# Altium PCB Cheater Dice (00).PcbDoc
Units mil, origin at the board's own origin, x right, y up, seen from the top; angles counter-clockwise.
Board outline 1978.53 x 1230.5 mil, 2 copper layers (Top Layer, Bottom Layer); 33 components, 24 nets, 99 pads, 6 vias.
Unrouted connection lines stored in the file: 26.
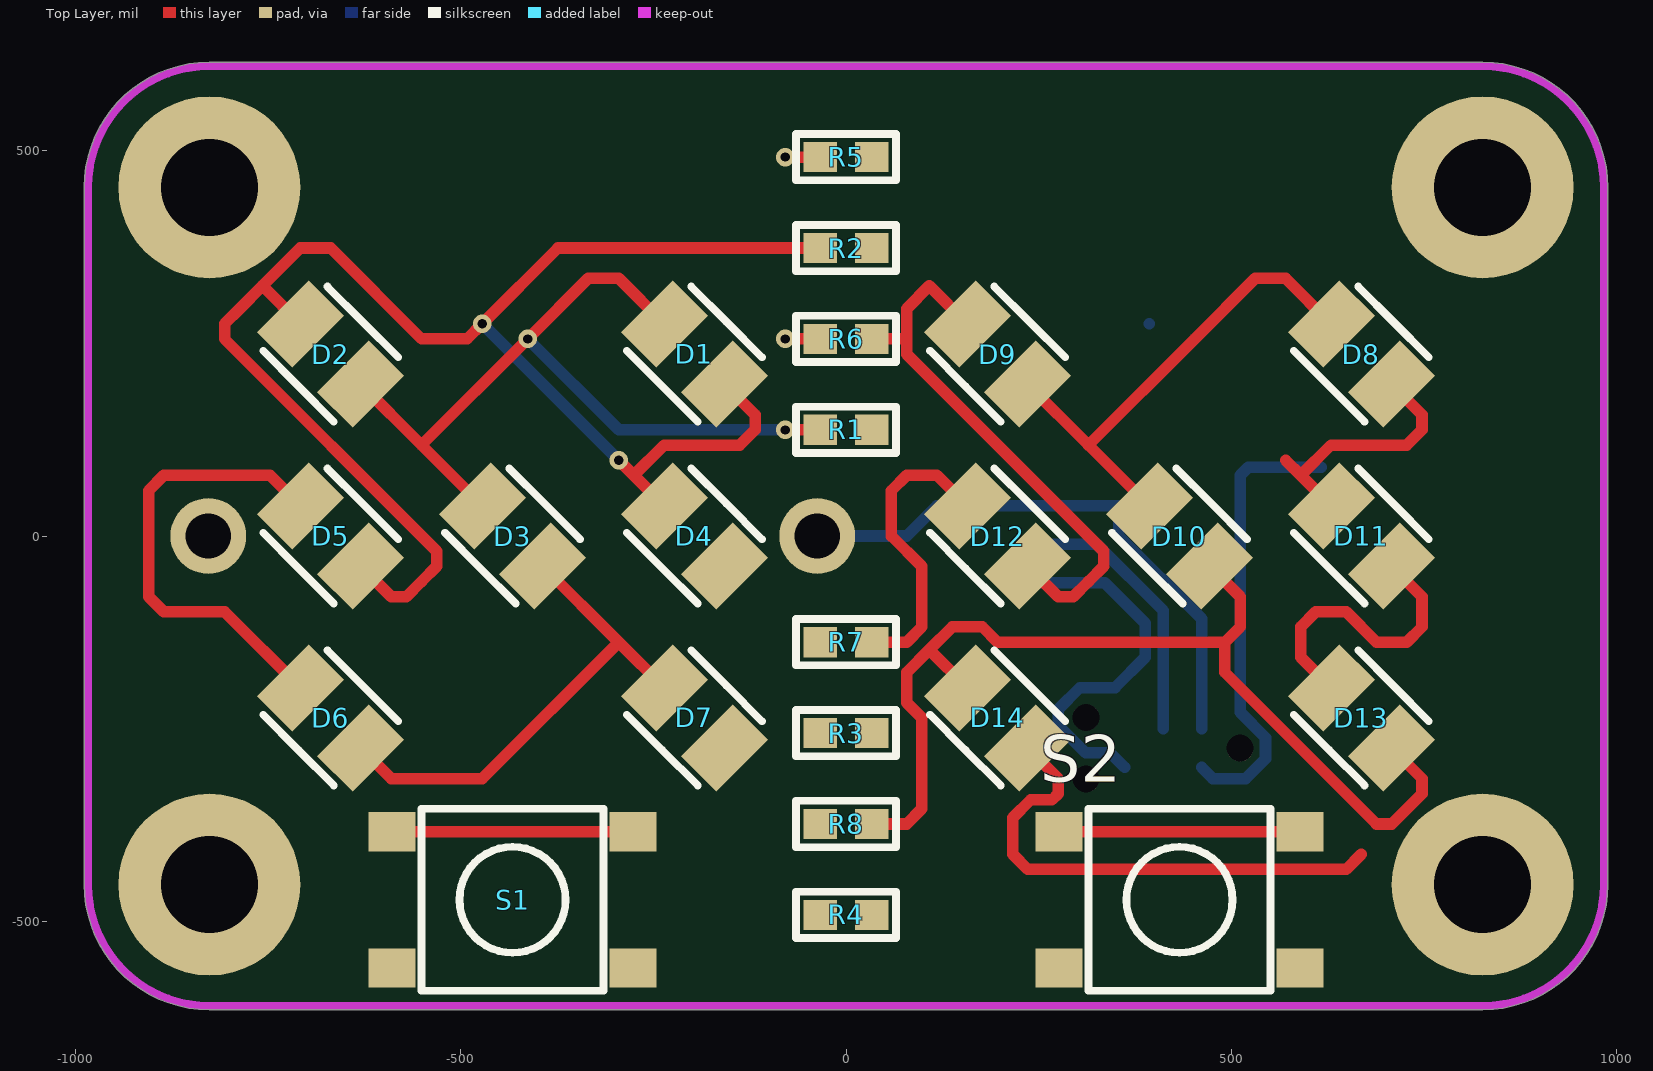
[diagram p0: Top Layer view]
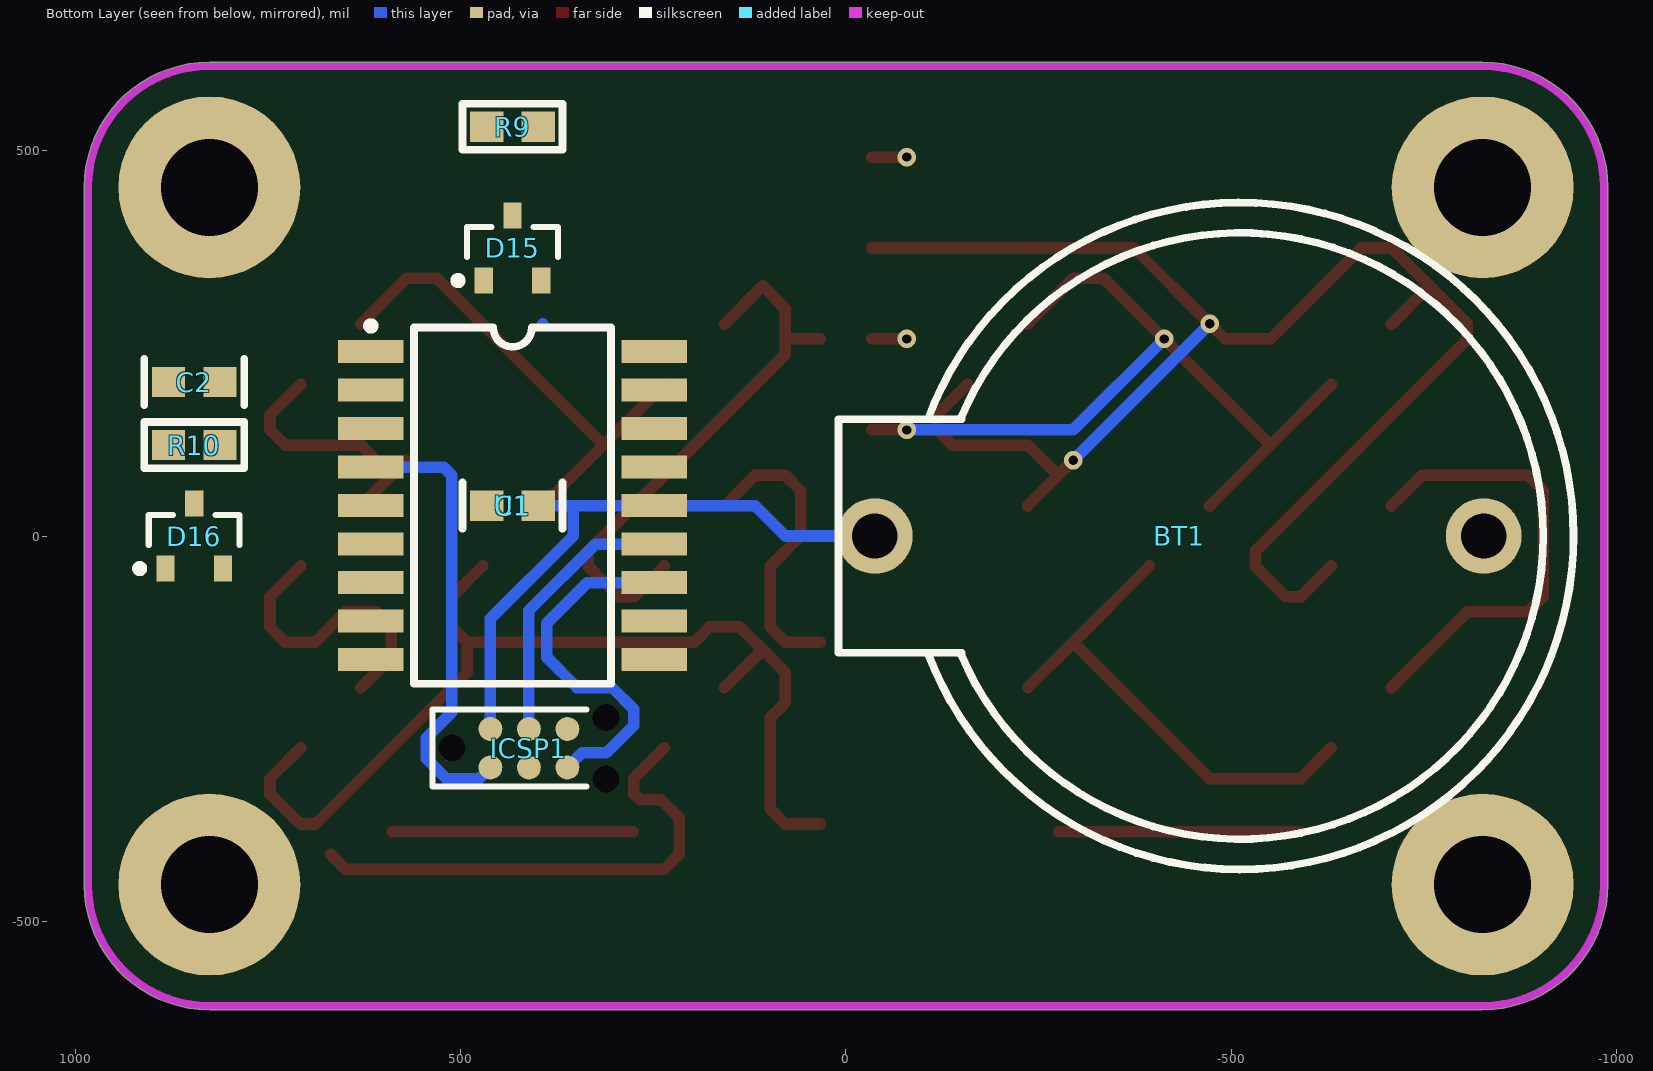
[diagram p1: Bottom Layer view, seen from below]

## Layer stack, top to bottom
Top Layer: signal copper 1.4
Dielectric: dielectric 12.6, FR-4, Dk 4.8
Bottom Layer: signal copper 1.4

## Board outline
-989.27,-452.76 -989.27,452.76 cw(c-984.25,452.76) -989.27,452.79 cw(c-826.77,452.76) -826.77,615.25 826.77,615.25 cw(c826.77,452.76) 989.27,452.76 989.27,-452.76 cw(c984.25,-452.76) 989.27,-452.79 ccw(c826.77,-452.76) 989.27,-452.76 989.27,-452.79 cw(c826.77,-452.76) 826.77,-615.25 -826.77,-615.25 cw(c-826.77,-452.76)

## Design rules (kind name [scope] priority, off if disabled: settings)
Clearance Poly_GND [inPolygon vs not innet (gnd)] p1: gap=20
Clearance [All] p2: gap=8
PolygonConnect [All] p1: connectstyle=Relief reliefconductorwidth=10 reliefentries=4 polygonreliefangle="90 Angle" airgapwidth=10
RoutingVias [All] p1: holewidth=12 width=24 viastyle="Through Hole" minholewidth=12 minwidth=24 maxholewidth=28 maxwidth=50
SolderMaskExpansion [All] p1: expansion=4
Width Standard [All] p1: maxlimit=25 minlimit=8 preferedwidth=8
Width Power [inNet('VIN')] p2: maxlimit=100 minlimit=8 preferedwidth=25
28 further rules are at their usual default settings.

## Classes and differential pairs
component class "Cheater Dice": BT1
component class U_LEDS: D1 D2 D3 D4 D5 D6 D7 D8 D9 D10 D11 D12 D13 D14 R1 R2 R3 R4 R5 R6 R7 R8
component class U_PIC16F87: C1 C2 D15 D16 ICSP1 R9 R10 S1 S2 U1

## Components (designator, comment, footprint, x,y, rotation, side; value= is the part's Value field where it differs from the comment)
BT1 "Battery" CR2032 -511.81,0 r180 bottom
C1 "100nF" "CAP (3D) - 0603" 433.07,39.37 r0 bottom
C2 "330pF" "CAP (3D) - 0603" 846.46,200 r180 bottom
D1 "LED (RED)" PLCC_2 -196.85,236.22 r135 top
D2 "LED (RED)" PLCC_2 -669.29,236.22 r135 top
D3 "LED (RED)" PLCC_2 -433.07,0 r135 top
D4 "LED (RED)" PLCC_2 -196.85,0 r135 top
D5 "LED (RED)" PLCC_2 -669.29,0 r135 top
D6 "LED (RED)" PLCC_2 -669.29,-236.22 r135 top
D7 "LED (RED)" PLCC_2 -196.85,-236.22 r135 top
D8 "LED (RED)" PLCC_2 669.29,236.22 r135 top
D9 "LED (RED)" PLCC_2 196.85,236.22 r135 top
D10 "LED (RED)" PLCC_2 433.07,0 r135 top
D11 "LED (RED)" PLCC_2 669.29,0 r135 top
D12 "LED (RED)" PLCC_2 196.85,0 r135 top
D13 "LED (RED)" PLCC_2 669.29,-236.22 r135 top
D14 "LED (RED)" PLCC_2 196.85,-236.22 r135 top
D15 "BAS16" SOT-23_L 433.07,374.02 r90 bottom
D16 "BAS16" SOT-23_L 846.46,0 r90 bottom
ICSP1 "TAG CONNECT" "ICSP - TAG CONNECT TYPE2" 511.81,-275.59 r0 bottom
R1 "470R" "RES (3D) - 0603" 0,137.8 r0 top
R2 "470R" "RES (3D) - 0603" 0,374.02 r0 top
R3 "470R" "RES (3D) - 0603" 0,-255.91 r0 top
R4 "470R" "RES (3D) - 0603" 0,-492.13 r0 top
R5 "470R" "RES (3D) - 0603" 0,492.13 r180 top
R6 "470R" "RES (3D) - 0603" 0,255.91 r180 top
R7 "470R" "RES (3D) - 0603" 0,-137.8 r180 top
R8 "470R" "RES (3D) - 0603" 0,-374.02 r180 top
R9 "1k" "RES (3D) - 0603" 433.07,531.5 r0 bottom
R10 "220K" "RES (3D) - 0603" 846.46,118.11 r0 bottom
S1 "SWITCH" "TACT 6mm" -433.07,-472.44 r0 top
S2 "SWITCH" "TACT 6mm" 433.07,-472.44 r0 top
U1 "PIC16F87/88" SOIC-18 433.07,39.37 r270 bottom

## Footprints (in the part's own frame and the unit in brackets; to place one, negate y for a bottom-side part, rotate by r counter-clockwise, add the part's x,y. Pads: shape width x height; smd on the part's side, far side on the other; paste and mask are expansions set on the pad)
"CAP (3D) - 0603" [mm]
  rect 1.1x1 smd: 1(0.85,0) 2(-0.85,0)
  silkscreen extent -1.65,-0.76 1.65,0.76, body extent -0.8,-0.4 0.8,0.4, height 0.92
CR2032 [mm]
  round 2.5 hole 1.5: 1(-12.05,0) 2(8.035,0)
  silkscreen extent -13.25,-11 11,11
"ICSP - TAG CONNECT TYPE2" [mil] "ICSP - TAG CONNECT - TYPE 2"
  round 31 smd paste-40: 1(-50,25) 2(-50,-25) 3(-100,25) 4(-100,-25) 5(-150,25) 6(-150,-25)
  round 34 hole 35 unplated: A(0,0) B(-200,-40) C(-200,40)
  silkscreen extent -175,-50 25,50
PLCC_2 [mm]
  rect 1.65x2.41 smd: 1(-1.4,0) 2(1.4,0)
  silkscreen extent -1.65,-1.5 1.65,1.5, body extent -1.85,-1.5 1.85,1.5, height 2.15
"RES (3D) - 0603" [mm]
  rect 1.1x1 smd: 1(0.85,0) 2(-0.85,0)
  silkscreen extent -1.65,-0.76 1.65,0.76, body extent -0.8,-0.4 0.8,0.4, height 0.92
SOIC-18 [mil]
  rect 30x85 smd: 1(-200,-184.05) 2(-150,-184.05) 3(-100,-184.05) 4(-50,-184.05) 5(0,-184.05) 6(50,-184.05) 7(100,-184.05) 8(150,-184.05) 9(200,-184.05) 10(200,184.06) 11(150,184.06) 12(100,184.06) 13(50,184.06) 14(0,184.06) 15(-50,184.06) 16(-100,184.06) 17(-150,184.06) 18(-200,184.06)
  silkscreen extent -238,-189 231,128, body extent -236,-148 236,148, height 100
SOT-23_L [mm] "SOT23, 3-Leads, Body 2.9x1.3mm, Pitch 0.95mm, Lead Span 2.5mm, IPC High Density"
  rect 0.85x0.6 smd: 1(-1.075,0.95) 2(-1.075,-0.95) 3(1.075,0)
  silkscreen extent -1.2,-1.5 0.7,1.93, body extent -0.7,-1.5 0.7,1.5, height 1.1
"TACT 6mm" [mm]
  rect 1.55x1.3 smd: 1(-3.975,-2.25) 1(3.975,-2.25) 2(-3.975,2.25) 2(3.975,2.25)
  silkscreen extent -3,-3 3,3, body extent -3,-3 3,3, height 5

## Part data
BT1: "Multicell Battery"
C1 C2: library part CAP, "CAPACITOR SMD 0402"
D1 D2 D3 D4 D5 D6 D7 D8 D9 D10 D11 D12 D13 D14: library part "LED 3mm RED", "3mm RED LED"
D15 D16: library part "Diode BAS16", "Silicon Switching Diode for High-Speed Switching"
ICSP1: library part "ICSP - TAG CONNECT"
R1 R2 R3 R4 R5 R6 R7 R8: library part "RES SMD 0603 590R", "RESISTOR SMD 0603 590R"
R9 R10: library part RES, "ZERO OHM LINK"
S1 S2: library part "TACT SWITCH ALPS SKQMAQ", "Switch"
U1: "PIC16F88"

## Free pads (board coordinates)
  round 236.22 hole 125.98: 0(-826.77,-452.76) 0(-826.77,452.76) 0(826.77,-452.76) 0(826.77,452.76)

## Via types
v1: diameter 24, hole 12, Top Layer to Bottom Layer, 6 vias

## Nets (pads, with @x,y where several pads share a name; then routed paths per layer and width w, separated by ;. In a path a pad name is that pad's centre, name@x,y a point inside that pad or via, vN(x,y) a via of type N, cw(c..) or ccw(c..) an arc to the next point about the centre after c; other vN are vias at no path point)
BUTTON_0: S1.2 U1.6 | length 313
  Top Layer w15: S1.2@-589.57,-383.86 S1.2@-276.57,-383.86
BUTTON_1: S2.2 U1.7 | length 313
  Top Layer w15: S2.2@276.57,-383.86 S2.2@589.57,-383.86
COMP_OSC_OUT: D16.1 U1.2 U1.3
GND: BT1.2 C1.1 C2.2 D15.1 ICSP1.3 R10.1 S1.1 S2.1 U1.5
ICSP_VPP: ICSP1.1 U1.4 | length 591
  Bottom Layer w15: ICSP1.1 476.18,-314.96 519.11,-314.96 544.81,-289.26 544.81,-261.92 511.81,-228.92 511.81,78.74 522.44,89.37 U1.4
LED_0: R1.1 U1.8
LED_1: R2.1 U1.9
LED_2: R3.1 U1.10
LED_3: R4.1 U1.11
LED_4: ICSP1.5 R5.1 U1.12 | length 522.1
  Top Layer w15: v1(-78.74,492.13) R5.1
  Bottom Layer w15: U1.12 336.22,-60.63 388.81,-113.22 388.81,-157.48 349.44,-196.85 303.88,-196.85 275.59,-225.14 275.59,-246.04 311.14,-281.59 342.81,-281.59 ICSP1.5
LED_5: ICSP1.4 R6.1 U1.13 | length 397.5
  Top Layer w15: v1(-78.74,255.91) R6.1
  Bottom Layer w15: U1.13 325.59,-10.63 411.81,-96.85 ICSP1.4
NetD1_1: D1.1 D2.2 D4.2 D5.1 R2.2 | length 2135.6
  Top Layer w15: D2.2 -757.87,324.8 ; D5.1 -590.55,-78.74 -570.87,-78.74 -551.18,-59.06 -531.5,-39.37 -531.5,-19.68 -807.09,255.91 -807.09,275.59 -787.4,295.28 -757.87,324.8 ; v1(-295.28,98.43) -275.59,78.74 ; D4.2 -275.59,78.74 ; D1.1 -118.11,157.48 -118.11,137.8 -137.8,118.11 -236.22,118.11 -275.59,78.74 ; R2.2 -374.02,374.02 v1(-472.44,275.59) -492.13,255.91 -551.18,255.91 -669.29,374.02 -708.66,374.02 -757.87,324.8
  Bottom Layer w15: v1(-472.44,275.59) v1(-295.28,98.43)
NetD1_2: D1.2 D2.1 D3.2 R1.2 | length 1082.3
  Top Layer w15: D2.1 -551.18,118.11 ; D3.2 -551.18,118.11 ; D1.2 -295.28,334.65 -334.65,334.65 v1(-413.39,255.91) -551.18,118.11 ; v1(-78.74,137.8) R1.2
  Bottom Layer w15: v1(-413.39,255.91) -295.28,137.8 v1(-78.74,137.8)
NetD3_1: D3.1 D6.1 D7.2 R4.2 | length 648.7
  Top Layer w15: D6.1 -590.55,-314.96 -472.44,-314.96 -295.28,-137.8 ; D3.1 -295.28,-137.8 ; D7.2 -295.28,-137.8
NetD4_1: D4.1 D5.2 D6.2 D7.1 R3.2 | length 606
  Top Layer w15: D6.2 -807.09,-98.43 -885.83,-98.43 -905.51,-78.74 -905.51,59.05 -885.83,78.74 -748.03,78.74 D5.2
NetD8_1: D8.1 D9.2 D11.2 D12.1 R6.2 | length 1071.4
  Top Layer w15: R6.2 78.74,255.91 ; D9.2 108.27,324.8 78.74,295.28 78.74,255.91 ; D12.1 275.59,-78.74 295.28,-78.74 314.96,-59.06 334.65,-39.37 334.65,-19.69 78.74,236.22 78.74,255.91 ; 570.87,98.43 590.55,78.74 ; D11.2 590.55,78.74 ; D8.1 748.03,157.48 748.03,137.8 728.35,118.11 629.92,118.11 590.55,78.74
NetD8_2: D8.2 D9.1 D10.2 R5.2 | length 653.5
  Top Layer w15: D9.1 314.96,118.11 ; D10.2 314.96,118.11 ; D8.2 570.87,334.65 531.5,334.65 452.76,255.91 314.96,118.11
NetD10_1: D10.1 D13.1 D14.2 R8.2 | length 1367.1
  Top Layer w15: R8.2 78.74,-374.02 98.43,-354.33 98.43,-236.22 78.74,-216.54 78.74,-177.17 108.27,-147.64 ; D14.2 108.27,-147.64 ; D10.1 511.81,-78.74 511.81,-118.11 492.13,-137.8 ; D13.1 748.03,-314.96 748.03,-334.65 708.66,-374.02 688.98,-374.02 492.13,-177.17 492.13,-137.8 ; 108.27,-147.64 137.8,-118.11 177.17,-118.11 196.85,-137.8 492.13,-137.8
NetD11_1: D11.1 D12.2 D13.2 D14.1 R7.2 | length 1435.8
  Top Layer w15: R7.2 78.74,-137.8 98.43,-118.11 98.43,-39.37 59.06,0 59.06,59.06 78.74,78.74 118.11,78.74 D12.2 ; D14.1 275.59,-314.96 275.59,-334.65 267.47,-342.77 239.64,-342.77 216.54,-365.88 216.54,-413.39 236.22,-433.07 649.61,-433.07 669.29,-413.39 ; D13.2 590.55,-157.48 590.55,-118.11 610.24,-98.43 649.61,-98.43 688.98,-137.8 728.35,-137.8 748.03,-118.11 748.03,-78.74 D11.1
NetR7_1: R7.1 U1.15
NetR8_1: R8.1 U1.16
SENSE: C2.1 D16.3 R10.2 U1.1
THRESHOLD: D15.3 R9.1 U1.17
VCC: BT1.1 C1.2 ICSP1.2 R9.2 U1.14 | length 748.4
  Bottom Layer w15: BT1.1@1.97,0 78.74,0 118.11,39.37 U1.14 354.33,39.37 ; C1.2 354.33,39.37 ; ICSP1.2 461.81,-107.48 354.33,0 354.33,39.37
pads on no net: D15.2 D16.2 ICSP1.6 ICSP1.A ICSP1.B ICSP1.C U1.18

## Keep-outs
Keep-Out Layer:
  lines w10: -984.25,452.76 cw(c-826.77,452.76) -826.77,610.24 826.77,610.24 cw(c826.77,452.76) 984.25,452.76 984.25,-452.76 ; -984.25,452.76 -984.25,-452.76 ccw(c-826.77,-452.76) -826.77,-610.24 826.77,-610.24 ccw(c826.77,-452.76) 984.25,-452.76 ; -984.25,452.76 -984.25,452.76 ; 984.25,-452.76 984.25,-452.76

## Silkscreen, mask and mechanical layers (free items; w line width, h text height)
Mechanical 1:
  lines w10: -984.25,452.76 cw(c-826.77,452.76) -826.77,610.24 826.77,610.24 cw(c826.77,452.76) 984.25,452.76 984.25,-452.76 ; -984.25,452.76 -984.25,-452.76 ccw(c-826.77,-452.76) -826.77,-610.24 826.77,-610.24 ccw(c826.77,-452.76) 984.25,-452.76 ; -984.25,452.76 -984.25,452.76 ; 984.25,-452.76 984.25,-452.76